# Altium PCB PCB3.PcbDoc
Units mm, origin at the board's own origin, x right, y up, seen from the top; angles counter-clockwise.
Board outline 98 x 21 mm, 2 copper layers (Top Layer, Bottom Layer), stack 1.58 mm thick; 47 components, 69 nets, 176 pads, 19 vias.
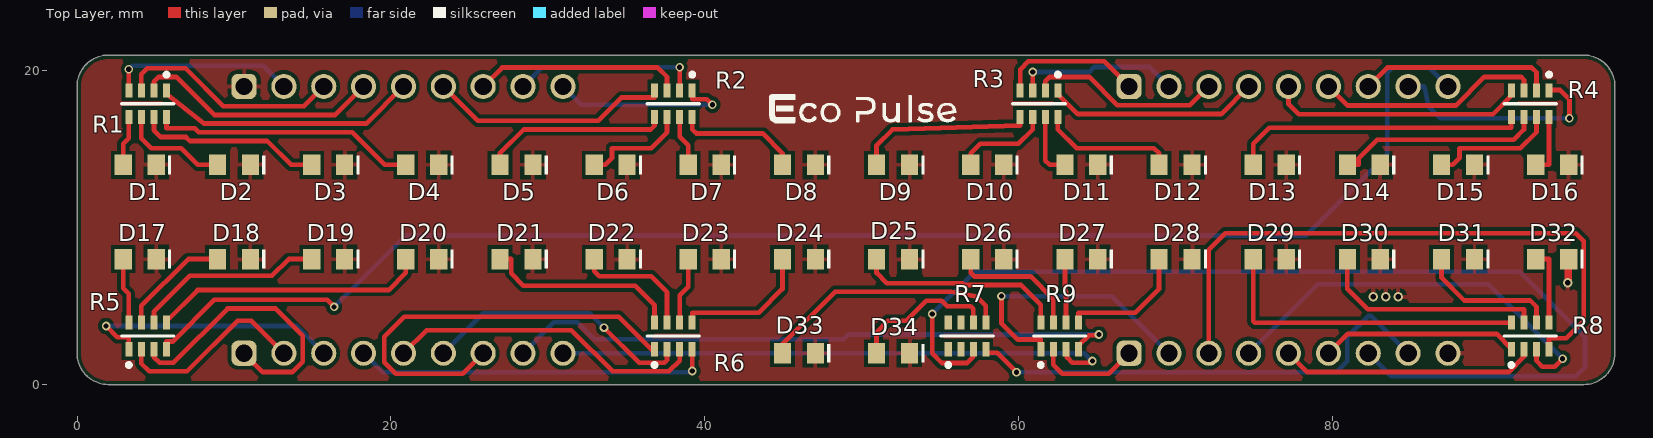
[diagram p0: Top Layer view]
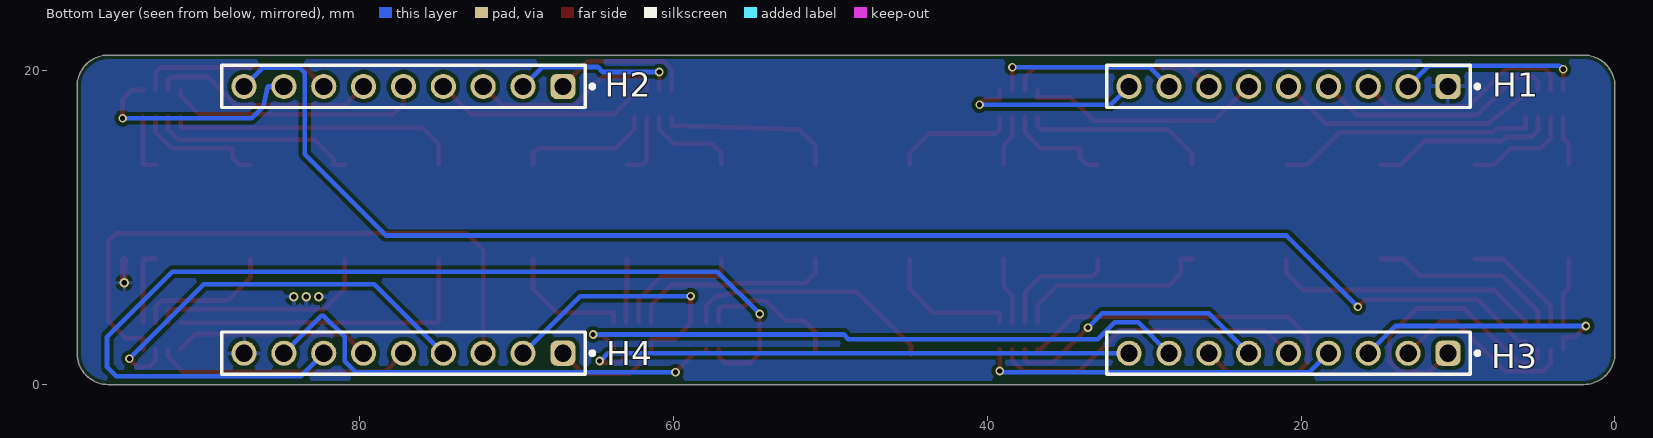
[diagram p1: Bottom Layer view, seen from below]
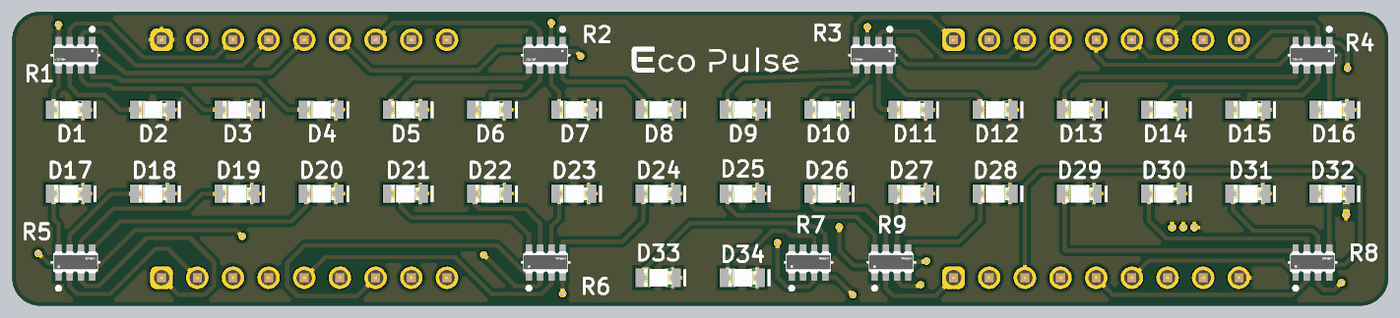
[diagram p2: 3D render of the assembled board from above, using the file's embedded part models]
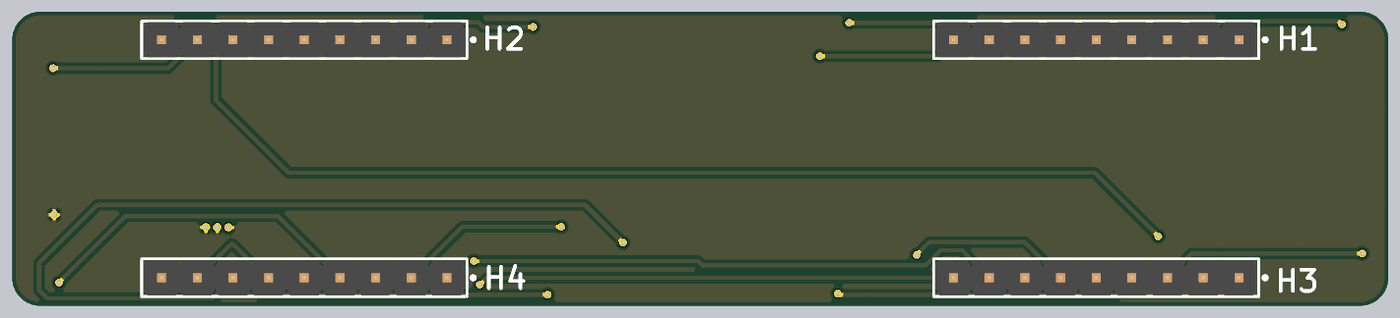
[diagram p3: 3D render of the assembled board from below, using the file's embedded part models]

## Layer stack, top to bottom
Top Solder: solder mask 0.0102, Solder Resist, Dk 3.5
Top Layer: signal copper 0.0356
Dielectric 1: dielectric 1.5086, FR-4, Dk 4.8
Bottom Layer: signal copper 0.0356
Bottom Solder: solder mask 0.0102, Solder Resist, Dk 3.5

## Board outline
0,2 0,19 cw(c2,19) 2,21 96,21 cw(c96,19) 98,19 98,2 cw(c96,2) 96,0 2,0 cw(c2,2)

## Design rules (kind name [scope] priority, off if disabled: settings)
BoardOutlineClearance [All] p1: gap=0.254 ignorepadtopadclearanceinfootprint=FALSE
Clearance [All] p1: gap=0.254 ignorepadtopadclearanceinfootprint=FALSE
PolygonConnect [All] p1: connectstyle=Relief reliefconductorwidth=0.254 reliefentries=4 polygonreliefangle="90 Angle" airgapwidth=0.254
RoutingLayers RoutingLayers_1 [InNet('GND')] p1: top layer_v5=FALSE bottom layer_v5=FALSE
RoutingLayers [All] p2: top layer_v5=TRUE bottom layer_v5=TRUE
RoutingVias [All] p1: holewidth=0.33 width=0.55 viastyle="Through Hole" minholewidth=0.32 minwidth=0.5 maxholewidth=0.35 maxwidth=0.6
SilkToSolderMaskClearance [IsPad] p1: minsilkscreentomaskgap=0.1 clearancetoexposedcopper=TRUE
SolderMaskExpansion [All] p1: expansion=0.102 istentingtop=FALSE
SupplyNets "Schematic Supply Nets" [InNet('GND')] p1: voltage=0.000
Width [All] p1: maxlimit=1 minlimit=0.254 preferedwidth=0.3 minimp=50.000000 maximp=50.000000 favimp=50.000000
28 further rules are at their usual default settings.

## Classes and differential pairs
component class Sheet1: D1 D2 D3 D4 D5 D6 D7 D8 D9 D10 D11 D12 D13 D14 D15 D16 D18 D20 D22 D24 D26 D28 D30 D32 D33 D34 H1 H2 H3 H4 R1 R2 R3 R4 R5 R6 R7 R8 R9

## Components (designator, comment, footprint, x,y, rotation, side; value= is the part's Value field where it differs from the comment)
D1 "SHAFT" WL-SMCW_0805_150080xx75000 4,14 r180 top
D2 "B1" WL-SMCW_0805_150080xx75000 10,14 r180 top
D3 "B2" WL-SMCW_0805_150080xx75000 16,14 r180 top
D4 "B3" WL-SMCW_0805_150080xx75000 22,14 r180 top
D5 "B4" WL-SMCW_0805_150080xx75000 28,14 r180 top
D6 "B5" WL-SMCW_0805_150080xx75000 34,14 r180 top
D7 "B6" WL-SMCW_0805_150080xx75000 40,14 r180 top
D8 "B7" WL-SMCW_0805_150080xx75000 46,14 r180 top
D9 "B8" WL-SMCW_0805_150080xx75000 52,14 r180 top
D10 "B9" WL-SMCW_0805_150080xx75000 58,14 r180 top
D11 "B10" WL-SMCW_0805_150080xx75000 64,14 r180 top
D12 "B11" WL-SMCW_0805_150080xx75000 70,14 r180 top
D13 "B12" WL-SMCW_0805_150080xx75000 76,14 r180 top
D14 "B13" WL-SMCW_0805_150080xx75000 82,14 r180 top
D15 "B14" WL-SMCW_0805_150080xx75000 88,14 r180 top
D16 "B15" WL-SMCW_0805_150080xx75000 94,14 r180 top
D17 "B19" WL-SMCW_0805_150080xx75000 4,8 r180 top
D18 "B18" WL-SMCW_0805_150080xx75000 10,8 r180 top
D19 "B17" WL-SMCW_0805_150080xx75000 16,8 r180 top
D20 "B16" WL-SMCW_0805_150080xx75000 22,8 r180 top
D21 "B23" WL-SMCW_0805_150080xx75000 28,8 r180 top
D22 "B22" WL-SMCW_0805_150080xx75000 34,8 r180 top
D23 "B21" WL-SMCW_0805_150080xx75000 40,8 r180 top
D24 "B20" WL-SMCW_0805_150080xx75000 46,8 r180 top
D25 "B27" WL-SMCW_0805_150080xx75000 52,8 r180 top
D26 "B26" WL-SMCW_0805_150080xx75000 58,8 r180 top
D27 "B25" WL-SMCW_0805_150080xx75000 64,8 r180 top
D28 "B44" WL-SMCW_0805_150080xx75000 70,8 r180 top
D29 "B31" WL-SMCW_0805_150080xx75000 76,8 r180 top
D30 "B30" WL-SMCW_0805_150080xx75000 82,8 r180 top
D31 "B29" WL-SMCW_0805_150080xx75000 88,8 r180 top
D32 "B28" WL-SMCW_0805_150080xx75000 94,8 r180 top
D33 "B28" WL-SMCW_0805_150080xx75000 46,2 r180 top
D34 "B34" WL-SMCW_0805_150080xx75000 52,2 r180 top
H1 "61300911121" 61300911121 20.8,19 r0 bottom
H2 "61300911121" 61300911121 77.2,19 r0 bottom
H3 "61300911121" 61300911121 20.8,2 r0 bottom
H4 "61300911121" 61300911121 77.2,2 r0 bottom
R1 "YC164-JR-071KL" FP-YC164-MFG 4.5,17.9 r180 top
R2 "YC164-JR-071KL" FP-YC164-MFG 38,17.9 r180 top
R3 "YC164-JR-071KL" FP-YC164-MFG 61.3,17.9 r180 top
R4 "YC164-JR-071KL" FP-YC164-MFG 92.6,17.9 r180 top
R5 "YC164-JR-071KL" FP-YC164-MFG 4.5,3.1 r0 top
R6 "YC164-JR-071KL" FP-YC164-MFG 38,3.1 r0 top
R7 "YC164-JR-071KL" FP-YC164-MFG 62.614,3.1 r0 top
R8 "YC164-JR-071KL" FP-YC164-MFG 92.6,3.1 r0 top
R9 "YC164-JR-071KL" FP-YC164-MFG 56.714,3.1 r0 top

## Footprints (in the part's own frame and the unit in brackets; to place one, negate y for a bottom-side part, rotate by r counter-clockwise, add the part's x,y. Pads: shape width x height; smd on the part's side, far side on the other; paste and mask are expansions set on the pad)
61300911121 [mm] "Pin Header, pitch 2.54 mm, THT, Vertical, single row, 9p"
  rrect50% 1.6x1.6 hole 1.1: 1(-10.16,0)
  round 1.6 hole 1.1: 2(-7.62,0) 3(-5.08,0) 4(-2.54,0) 5(0,0) 6(2.54,0) 7(5.08,0) 8(7.62,0) 9(10.16,0)
  silkscreen extent -12.15,-1.35 11.58,1.34, body extent -11.43,-1.27 11.43,1.27, height 8.57
FP-YC164-MFG [mm]
  rect 0.45x0.9 smd paste+0 mask+0: 1(-1.2,-0.85) 2(-0.4,-0.85) 3(0.4,-0.85) 4(1.2,-0.85) 5(1.2,0.85) 6(0.4,0.85) 7(-0.4,0.85) 8(-1.2,0.85)
  silkscreen extent -1.67,-1.97 1.68,0, body extent -1.78,-1.4 1.78,1.4, height 0.25
WL-SMCW_0805_150080xx75000 [mm] "SMD Mono-color Chip LED, body 2.0x1.25mm"
  rect 1.1x1.3 smd: 1(-1.05,0) 2(1.05,0)
  silkscreen extent -2,-0.6 -1.8,0.6, body extent -1,-0.63 1,0.62, height 0.7

## Part data
D1 D2 D3 D4 D5 D6 D7 D8 D9 D10 D11 D12 D13 D14 D15 D16 D17 D18 D19 D20 D21 D22 D23 D24 D25 D26 D27 D28 D29 D30 D31 D32 D33 D34: library part CMP-1426-00009-6, "WL-SMCW SMT Mono-Color Chip LED Waterclear", Case Code (Imperial)=0805, Case Code (Metric)=2012, Color=Green, Forward Current=100mA, Forward Voltage=2V, Max Junction Temperature (Tj)=95°C, Max Operating Temperature=85°C, Max Reverse Voltage (DC)=5V, Min Operating Temperature=-40°C, Power Dissipation=72mW, Test Current=20mA, Case/Package=0805, Dominant Wavelength=570nm, Height=700µm, Length=2mm, Lens Style="Clear, Rectangular", Luminous Intensity=40mcd, Mount="Surface Mount", Packaging="Tape and Reel", Peak Wavelength=572nm, REACH SVHC=Unknown, Reverse Voltage=5V, RoHS=Compliant, Viewing Angle=140°, Wavelength=570nm, Width=1.25mm
H1 H2 H3 H4: library part CMP-1502-01080-3, Color=Black, Contact Resistance=20mΩ, Current Rating=3A, Operating Supply Voltage=250V, Connector Type="Male Pin", Contact Material=Copper, Contact Mating Length=5.9944mm, Contact Plating=Gold, Gender=Male, Lead Pitch=2.54mm, Mount="Through Hole", NexarPartId=32855536, Number of Contacts=9, Number of Pins=9, Number of Positions=9, Number of Rows=1, Orientation=Vertical, Packaging=Bulk, Pitch=2.54mm, REACH SVHC=Unknown, RoHS=Compliant, Termination=Solder
R1 R2 R3 R4 R5 R6 R7 R8 R9: library part CMP-03411-000004-1, "RES ARRAY 4 RES 1K OHM 1206", Case Code (Imperial)=1206, Case Code (Metric)=3216, Case/Package=0603, Max Operating Temperature=155°C, Min Operating Temperature=-55°C, Number of Resistors=4, Package Quantity=1, Power Dissipation=62.5mW, Resistance=1kR, Resistance Tolerance=5%, Temperature Coefficient=200ppm/°C, Voltage Rating=50V, Circuit Type=Isolated, Depth=1.6mm, Height=0.028inch, Lead Free="Lead Free", Length=0.126inch, Military Standard=Not, Mount="Surface Mount", Number of Circuits=4, Number of Contacts=8, Number of Elements=4, Number of Pins=8, Number of Terminals/Pins=8, Packaging="Cut Tape", Power Per Element=62.5mW, Radiation Hardening=No, RoHS Compliant=Yes, Series=YC164, Size Code=0603, Technology="THICK FILM", Terminal Pitch=0.8mm, Termination=Convex, Tolerance=5%, Width=0.063inch, Working Voltage=50V

## Via types
v1: diameter 0.55, hole 0.33, Top Layer to Bottom Layer, 15 vias
v2: diameter 0.6, hole 0.35, Top Layer to Bottom Layer, 4 vias

## Nets (pads, with @x,y where several pads share a name; then routed paths per layer and width w, separated by ;. In a path a pad name is that pad's centre, name@x,y a point inside that pad or via, vN(x,y) a via of type N, cw(c..) or ccw(c..) an arc to the next point about the centre after c; other vN are vias at no path point)
GND: D1.1 D2.1 D3.1 D4.1 D5.1 D6.1 D7.1 D8.1 D9.1 D10.1 D11.1 D12.1 D13.1 D14.1 D15.1 D16.1 D17.1 D18.1 D19.1 D20.1 D21.1 D22.1 D23.1 D24.1 D25.1 D26.1 D27.1 D28.1 D29.1 D30.1 D31.1 D32.1 D33.1 D34.1 H1.1 H4.9 | length 1.5
  Top Layer w0.3: D32.1@95,7.95 D32.1
  Top Layer w0.5: v2(95,6.5) 95.019,6.519 95.019,7.931 D32.1@95,7.95
  other v2: 82.6,5.6 83.4,5.6 84.2,5.6
NetD1_2: D1.2 R1.5 | length 3.2
  Top Layer w0.3: D1.2 2.95,15.342 3.3,15.692 R1.5
NetD2_2: D2.2 R1.6 | length 6.9
  Top Layer w0.3: R1.6 4.1,15.702 4.74,15.062 6.636,15.062 7.698,14 D2.2
NetD3_2: D3.2 R1.7 | length 11.8
  Top Layer w0.3: R1.7 4.9,16.207 5.334,15.773 6.939,15.773 7.19,15.523 12.112,15.523 13.635,14 D3.2
NetD4_2: D4.2 R1.8 | length 16.9
  Top Layer w0.3: R1.8 5.7,16.332 7.492,16.332 7.747,16.077 17.522,16.077 19.599,14 D4.2
NetD5_2: D5.2 R2.5 | length 11.9
  Top Layer w0.3: D5.2 26.95,14.732 28.474,16.256 36.546,16.256 36.8,16.51 R2.5
NetD6_2: D6.2 R2.6 | length 6.8
  Top Layer w0.3: D6.2 33.655,14 34.087,14.432 34.087,15.062 36.576,15.062 37.6,16.086 R2.6
NetD7_2: D7.2 R2.7 | length 3.3
  Top Layer w0.3: R2.7 38.4,15.79 38.95,15.24 D7.2
NetD8_2: D8.2 R2.8 | length 7.9
  Top Layer w0.3: R2.8 39.2,16.256 39.454,16.002 43.688,16.002 44.95,14.74 D8.2
NetD9_2: D9.2 R3.5 | length 11.4
  Top Layer w0.3: D9.2 50.95,15.24 51.966,16.256 60.1,16.51 R3.5
NetD10_2: D10.2 R3.6 | length 6.1
  Top Layer w0.3: D10.2 56.95,14.732 57.56,15.342 59.986,15.342 60.9,16.256 R3.6
NetD11_2: D11.2 R3.7 | length 4.1
  Top Layer w0.3: R3.7 61.7,14.276 61.976,14 D11.2
NetD12_2: D12.2 R3.8 | length 8.6
  Top Layer w0.3: R3.8 62.5,16.256 63.694,15.062 68.62,15.062 68.95,14.732 D12.2
NetD13_2: D13.2 R4.5 | length 18.9
  Top Layer w0.3: D13.2 74.95,15.342 75.966,16.358 91.4,16.358 R4.5
NetD14_2: D14.2 R4.6 | length 13.2
  Top Layer w0.3: D14.2 81.661,14 81.661,14.427 82.842,15.608 91.552,15.608 92.2,16.256 R4.6
NetD15_2: D15.2 R4.7 | length 8.2
  Top Layer w0.3: D15.2 87.655,14 88.096,14.441 88.096,15.054 91.965,15.054 93,16.089 R4.7
NetD16_2: D16.2 R4.8 | length 3.9
  Top Layer w0.3: D16.2 93.8,14 R4.8
NetD17_2: D17.2 R5.8 | length 4.2
  Top Layer w0.3: D17.2 2.95,6.141 3.3,5.791 R5.8
NetD18_2: D18.2 R5.7 | length 7.1
  Top Layer w0.3: R5.7 4.1,5.012 7.088,8 D18.2
NetD19_2: D19.2 R5.6 | length 12.1
  Top Layer w0.3: R5.6 4.9,4.646 7.188,6.934 12.421,6.934 13.486,8 D19.2
NetD20_2: D20.2 R5.5 | length 17.5
  Top Layer w0.3: R5.5 5.7,4.049 7.677,6.026 19.864,6.026 20.95,7.112 D20.2
NetD21_2: D21.2 R6.8 | length 12.7
  Top Layer w0.3: D21.2 27.661,8 27.661,7.087 28.448,6.299 35.555,6.299 36.8,5.055 R6.8
NetD22_2: D22.2 R6.7 | length 7.9
  Top Layer w0.3: D22.2 32.95,7.233 33.274,6.909 36.576,6.909 37.6,5.885 R6.7
NetD23_2: D23.2 R6.6 | length 4.3
  Top Layer w0.3: R6.6 38.4,5.69 38.95,6.24 D23.2
NetD24_2: D24.2 R6.5 | length 8.9
  Top Layer w0.3: R6.5 39.2,4.58 43.434,4.58 44.95,6.096 D24.2
NetD25_2: D25.2 R7.8 | length 13.3
  Top Layer w0.3: D25.2 50.95,7.112 51.596,6.466 56.422,6.466 56.547,6.34 60.154,6.34 61.414,5.08 R7.8
NetD26_2: D26.2 R7.7 | length 8.3
  Top Layer w0.3: D26.2 56.95,7.112 57.168,6.894 60.771,6.894 62.214,5.451 R7.7
NetD27_2: D27.2 R7.6 | length 4.1
  Top Layer w0.3: D27.2 62.95,5.982 63.014,5.918 R7.6
NetD28_2: D28.2 R7.5 | length 8.3
  Top Layer w0.3: R7.5 63.814,4.572 67.426,4.572 68.95,6.096 D28.2
NetD29_2: D29.2 R8.8 | length 20.5
  Top Layer w0.3: D29.2 74.95,4.039 75.052,3.937 91.4,3.937 R8.8
NetD30_2: D30.2 R8.7 | length 14.5
  Top Layer w0.3: D30.2 80.95,6.096 82.242,4.804 92.2,4.804 R8.7
NetD31_2: D31.2 R8.6 | length 9
  Top Layer w0.3: D31.2 86.95,6.8 88.392,5.358 92.605,5.358 93,4.963 R8.6
NetD32_2: D32.2 R8.5 | length 4.9
  Top Layer w0.3: D32.2 93.8,8 R8.5
NetD33_2: D33.2 R9.5 | length 16.4
  Top Layer w0.3: D33.2@44.856,1.905 44.856,2.464 48.305,5.912 55.692,5.912 57.33,5.611 57.914,5.027 R9.5
NetD34_2: D34.2 R9.6 | length 9.4
  Top Layer w0.3: D34.2 50.95,3.35 51.664,4.064 52.843,4.064 54.116,5.337 55.098,5.337 55.439,4.996 56.944,4.996 57.114,4.826 R9.6
NetH1_2: H1.2 R1.4 | length 11.9
  Top Layer w0.3: R1.4 v1(3.3,20.091)
  Bottom Layer w0.3: v1(3.3,20.091) 3.529,20.32 11.86,20.32 H1.2
NetH1_3: H1.3 R1.3 | length 14.3
  Top Layer w0.3: R1.3 4.1,19.777 4.481,20.158 6.911,20.158 9.33,17.739 14.459,17.739 H1.3
NetH1_4: H1.4 R1.2 | length 15.8
  Top Layer w0.3: R1.2 4.9,19.304 5.2,19.604 6.329,19.604 8.748,17.185 16.445,17.185 H1.4
NetH1_5: H1.5 R1.1 | length 17
  Top Layer w0.3: R1.1 5.7,18.517 8.08,16.631 18.431,16.631 H1.5
NetH1_6: H1.6 R2.4 | length 15.4
  Top Layer w0.3: H1.6 25.525,16.815 33.198,16.815 34.671,18.288 36.8,18.288 R2.4
NetH1_7: H1.7 R2.3 | length 13.3
  Top Layer w0.3: H1.7 27.084,20.204 36.997,20.204 37.6,19.601 R2.3
NetH1_8: H1.8 R2.2 | length 12
  Top Layer w0.3: R2.2 v1(38.4,20.218)
  Bottom Layer w0.3: H1.8 29.638,20.218 v1(38.4,20.218)
NetH1_9: H1.9 R2.1 | length 12
  Top Layer w0.3: R2.1 39.2,18.186 40.132,18.186 v1(40.488,17.831)
  Bottom Layer w0.3: H1.9 32.129,17.831 v1(40.488,17.831)
NetH2_1: H2.1 R3.4 | length 9.1
  Top Layer w0.3: R3.4 60.1,20.077 60.619,20.596 65.444,20.596 H2.1
NetH2_2: H2.2 R3.3 | length 10.5
  Top Layer w0.3: R3.3 v1(60.9,19.917)
  Bottom Layer w0.3: v1(60.9,19.917) 64.489,19.917 64.815,20.244 68.336,20.244 H2.2
NetH2_3: H2.3 R3.2 | length 12.4
  Top Layer w0.3: R3.2 61.7,19.328 61.976,19.604 64.486,19.604 66.294,17.796 70.916,17.796 H2.3
NetH2_4: H2.4 R3.1 | length 13.6
  Top Layer w0.3: R3.1 62.5,18.517 63.775,17.242 72.902,17.242 H2.4
NetH2_5: H2.5 R4.4 | length 16.4
  Top Layer w0.3: H2.5 77.2,17.872 77.851,17.221 90.228,17.221 91.4,18.393 R4.4
NetH2_6: H2.6 R4.3 | length 14.5
  Top Layer w0.3: H2.6 80.96,17.78 87.847,17.78 89.671,19.604 92.029,19.604 92.2,19.433 R4.3
NetH2_7: H2.7 R4.2 | length 12.5
  Top Layer w0.3: H2.7 83.484,20.204 92.699,20.204 93,19.903 R4.2
NetH2_8: H2.8 R4.1 | length 14.4
  Top Layer w0.3: R4.1 93.8,18.771 94.513,18.771 95.098,18.186 v1(95.098,16.967)
  Bottom Layer w0.3: H2.8 85.852,19 86.131,17.704 86.868,16.967 v1(95.098,16.967)
NetH2_9: H2.9 R5.4 | length 93.3
  Top Layer w0.3: R5.4 5.7,2.743 6.096,2.743 8.75,5.397 15.938,5.397 v1(16.383,4.953)
  Bottom Layer w0.3: v1(16.383,4.953) 20.93,9.5 78.308,9.5 83.49,14.681 83.49,19.874 83.82,20.204 86.156,20.204 H2.9
NetH3_1: H3.1 R5.3 | length 18.4
  Top Layer w0.3: R5.3 4.9,1.753 5.257,1.396 6.146,1.396 9.593,4.843 12.657,4.843 14.384,3.117 14.384,1.464 13.716,0.796 11.844,0.796 H3.1
NetH3_2: H3.2 R5.2 | length 12.4
  Top Layer w0.3: R5.2 4.1,1.344 4.602,0.842 7.006,0.842 10.228,4.064 11.116,4.064 H3.2
NetH3_3: H3.3 R5.1 | length 17.1
  Top Layer w0.3: v1(1.854,3.734) 2.565,3.023 3.3,3.023 R5.1
  Bottom Layer w0.3: v1(1.854,3.734) 13.986,3.734 H3.3
NetH3_4: H3.4 R6.4 | length 22.9
  Top Layer w0.3: v1(39.2,0.864) R6.4
  Bottom Layer w0.3: H3.4 19.473,0.787 39.124,0.787 v1(39.2,0.864)
NetH3_5: H3.5 R6.3 | length 20.3
  Top Layer w0.3: H3.5 22.27,3.47 31.496,3.47 34.124,0.842 37.718,0.842 38.4,1.524 R6.3
NetH3_6: H3.6 R6.2 | length 17.4
  Top Layer w0.3: v1(33.579,3.632) 35.815,1.396 37.429,1.396 37.6,1.567 R6.2
  Bottom Layer w0.3: H3.6 25.887,4.547 32.664,4.547 v1(33.579,3.632)
NetH3_7: H3.7 R6.1 | length 27.4
  Top Layer w0.3: H3.7 24.566,0.686 20.32,0.686 19.583,1.422 19.583,3.048 20.853,4.318 34.526,4.318 36.608,2.235 36.8,2.235 R6.1
NetH3_8: H3.8 R7.4 | length 39.9
  Top Layer w0.3: R7.4 63.814,2.475 64.487,3.147 65.069,3.147 v1(65.117,3.195)
  Bottom Layer w0.3: H3.8 30.389,3.969 31.884,3.969 32.957,2.896 48.853,2.896 49.153,3.195 v1(65.117,3.195)
NetH3_9: H3.9 R7.3 | length 36.3
  Top Layer w0.3: R7.3 63.089,2.175 63.089,1.729 63.422,1.396 64.528,1.396 64.632,1.5 v1(64.7,1.5)
  Bottom Layer w0.3: H3.9 64.175,2 64.675,1.5 v1(64.7,1.5)
NetH4_1: H4.1 R7.2 | length 6.6
  Top Layer w0.3: R7.2 62.214,1.259 62.773,0.7 65.74,0.7 H4.1
NetH4_2: H4.2 R7.1 | length 17.5
  Top Layer w0.3: v1(58.903,5.639) 58.903,3.912 59.944,2.87 61.414,2.87 R7.1
  Bottom Layer w0.3: v1(58.903,5.639) 65.941,5.639 H4.2
NetH4_3: H4.3 R8.4 | length 39.6
  Top Layer w0.3: H4.3 72.12,8.595 73.177,9.652 95.504,9.652 96.012,9.144 96.012,4.064 94.894,2.946 93.8,2.946 R8.4
NetH4_4: H4.4 R8.3 | length 26.6
  Top Layer w0.3: R8.3 93,1.524 93.381,1.143 94.158,1.143 v1(94.666,1.651)
  Bottom Layer w0.3: H4.4 79.06,6.4 89.917,6.4 v1(94.666,1.651)
NetH4_5: H4.5 R8.2 | length 16.4
  Top Layer w0.3: H4.5 78.404,0.796 91.218,0.796 92.2,1.778 R8.2
NetH4_6: H4.6 R8.1 | length 12.6
  Top Layer w0.3: H4.6 80.966,3.226 90.46,3.226 91.4,2.286 R8.1
NetH4_7: H4.7 R9.3 | length 67
  Top Layer w0.3: v1(54.5,4.5) 54.5,1.99 55.118,1.372 56.708,1.372 57.114,1.778 R9.3
  Bottom Layer w0.3: v1(54.5,4.5) 57.2,7.2 91.936,7.2 96.088,3.048 96.088,1.118 95.504,0.533 83.747,0.533 H4.7
NetH4_8: H4.8 R9.4 | length 31
  Top Layer w0.3: R9.4 57.914,2.032 58.623,2.032 v1(59.868,0.787)
  Bottom Layer w0.3: v1(59.868,0.787) 80.239,0.787 80.95,1.499 80.95,3.048 82.296,4.394 82.426,4.394 H4.8
pads on no net: R9.1 R9.2 R9.7 R9.8

## Polygon pours and split planes (outlines as drawn)
GND on Top Layer "GND_L01_P000" (solid, pour order 0): 0,21.6 97.4,21.6 99.4,19.6 99.1,19.3 99.1,0 0,0
GND on Bottom Layer "GND_L02_P002" (solid, pour order 2): 0,22.5 0.2,22.3 100,22.3 100,0.8 99.2,0 0,0

## Silkscreen, mask and mechanical layers (free items; w line width, h text height)
Top Overlay:
  drawing of 9 lines, arcs and shapes, not listed
Mechanical 1:
  the board outline again, w0.254